# EAGLE board DAq2017 (EAGLE 7.2.0)
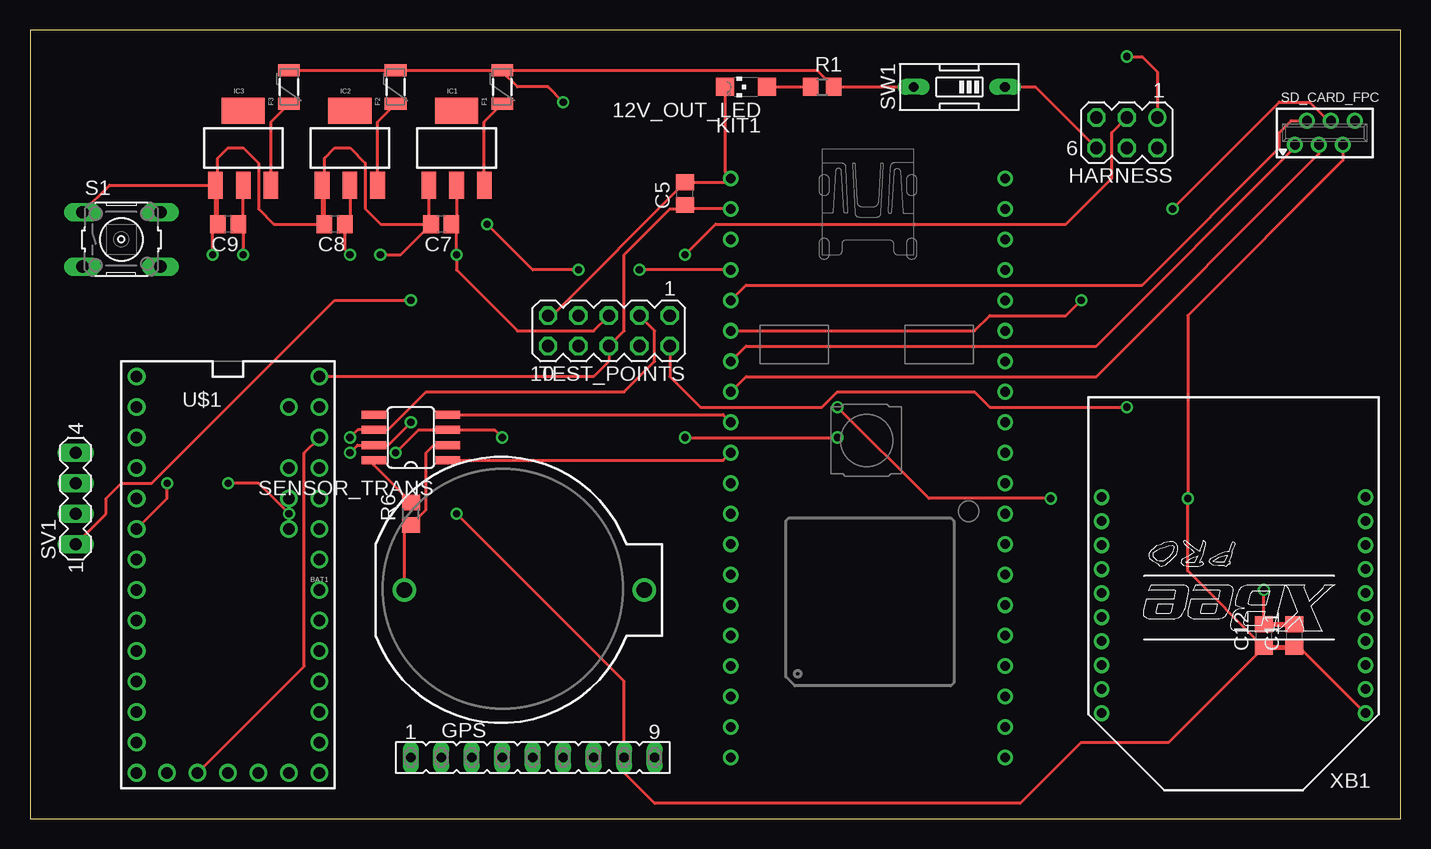
[diagram p0: board, top side]
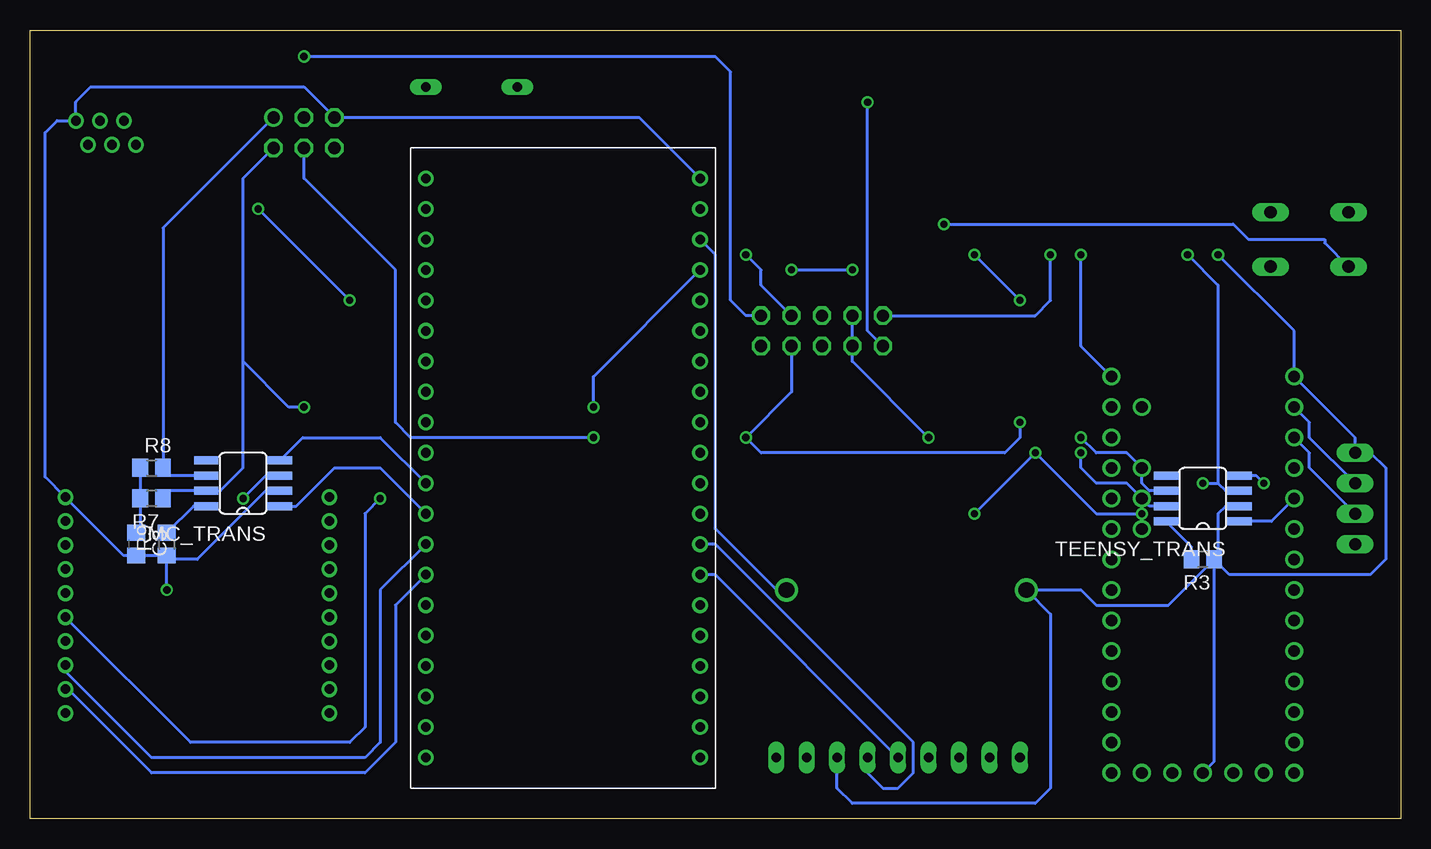
[diagram p1: board, bottom side, seen from below]

Size 114.28 x 65.71 mm. Coordinates in mm from the lower left corner, seen from the top.
Outline: 0,0 114.28,0 114.28,65.71 0,65.71 0,0
Copper layers (1*16): Top 0.035mm / dielectric 1.5mm / Bottom 0.035mm
Design rules "default *": minimum track width 10mil, minimum drill 24mil, track to track 8mil, track to pad 8mil, pad to pad 8mil, via to via 8mil, smd to smd 8mil, copper to edge 40mil, drill to drill 0.0006mm, minimum pad ring 10mil, minimum via ring 8mil, stop-mask expansion 4mil, vias tented up to drill 0mil, thermal gap 10mil

## Footprints (pad centres in the part's own frame; a part is rotated, then mirrored left to right if it is on the bottom)
CHIPLED_1206 = smd 1.5 x 1.5: A 0,-1.75; C 0,1.75
BATTCOM_20MM_PTH = drill 1.3: 1 11.85,0; 2 -8.15,0
C0805 = smd 1.3 x 1.5: 1 -0.95,0; 2 0.95,0
C0805' = smd 1.3 x 1.5: 1 -0.85,0; 2 0.85,0
PTC-1206 = smd 1 x 1.8: 1 -1.4,0; 2 1.4,0
FE09 = drill 0.813 long: 1 -10.16,0; 2 -7.62,0; 3 -5.08,0; 4 -2.54,0; 5 0,0; 6 2.54,0; 7 5.08,0; 8 7.62,0; 9 10.16,0
MA03-2 = drill 1.016: 1 -2.54,-1.27 | drill 1.016 octagon: 2 -2.54,1.27; 3 0,-1.27; 4 0,1.27; 5 2.54,-1.27; 6 2.54,1.27
SOT223 = smd 1.219 x 2.235: 1 -2.311,-3.099; 2 0,-3.099; 3 2.311,-3.099 | smd 3.6 x 2.2: 4 0,3.099
MBED-KIT = drill 0.8: D+ 11.43,1.27; D- 11.43,3.81; GND -11.43,24.13; IF+ 11.43,16.51; IF- 11.43,19.05; NR -11.43,16.51; P$5 -11.43,13.97; P$6 -11.43,11.43; P$7 -11.43,8.89; P$8 -11.43,6.35; P$9 -11.43,3.81; P$10 -11.43,1.27; P$11 -11.43,-1.27; P$12 -11.43,-3.81; P$13 -11.43,-6.35; P$14 -11.43,-8.89; P$15 -11.43,-11.43; P$16 -11.43,-13.97; P$17 -11.43,-16.51; P$18 -11.43,-19.05; P$19 -11.43,-21.59; P$20 -11.43,-24.13; P$21 11.43,-24.13; P$22 11.43,-21.59; P$23 11.43,-19.05; P$24 11.43,-16.51; P$25 11.43,-13.97; P$26 11.43,-11.43; P$27 11.43,-8.89; P$28 11.43,-6.35; P$29 11.43,-3.81; P$30 11.43,-1.27; RD+ 11.43,11.43; RD- 11.43,13.97; TD+ 11.43,6.35; TD- 11.43,8.89; VB -11.43,19.05; VIN -11.43,21.59; VOUT 11.43,24.13; VU 11.43,21.59
SO8 = smd 0.66 x 2.032: 1 -1.905,-3.073; 2 -0.635,-3.073; 3 0.635,-3.073; 4 1.905,-3.073; 5 1.905,3.073; 6 0.635,3.073; 7 -0.635,3.073; 8 -1.905,3.073
R0805 = smd 1.3 x 1.5: 1 -0.95,0; 2 0.95,0
B3F-10XX = drill 1.016 long: 1 -3.251,2.261; 2 3.251,2.261; 3 -3.251,-2.261; 4 3.251,-2.261
FH21-6S-1DSA = drill 0.813: 1 -2.5,-1; 2 -1.5,1; 3 -0.5,-1; 4 0.5,1; 5 1.5,-1; 6 2.5,1
MA04-1 = drill 1.016 long: 1 -3.81,0; 2 -1.27,0; 3 1.27,0; 4 3.81,0
EDG-01 = drill 0.813 long: 1 0,-3.81; 2 0,3.81
MA05-2 = drill 1.016 octagon: 1 -5.08,-1.27; 2 -5.08,1.27; 3 -2.54,-1.27; 4 -2.54,1.27; 5 0,-1.27; 6 0,1.27; 7 2.54,-1.27; 8 2.54,1.27; 9 5.08,-1.27; 10 5.08,1.27
TEENSY3-ALL_PINS = drill 0.965: 0 -7.62,13.97; 1 -7.62,11.43; 2 -7.62,8.89; 3 -7.62,6.35; 3.3V 7.62,11.43; 3.3V1 -2.54,-16.51; 4 -7.62,3.81; 5 -7.62,1.27; 6 -7.62,-1.27; 7 -7.62,-3.81; 8 -7.62,-6.35; 9 -7.62,-8.89; 10 -7.62,-11.43; 11 -7.62,-13.97; 12 -7.62,-16.51; 13 7.62,-16.51; 14/A0 7.62,-13.97; 15/A1 7.62,-11.43; 16/A2 7.62,-8.89; 17/A3 7.62,-6.35; 18/A4 7.62,-3.81; 19/A5 7.62,-1.27; 20/A6 7.62,1.27; 21/A7 7.62,3.81; 22/A8 7.62,6.35; 23/A9 7.62,8.89; A10 5.08,6.35; A11 5.08,3.81; AGND 7.62,13.97; AREF 5.08,8.89; GND -7.62,16.51; GND1 0,-16.51; PGM 2.54,-16.51; RESET/DAC 5.08,-16.51; VBAT -5.08,-16.51; VIN 7.62,16.51; VUSB 5.08,13.97
XBEE-PRO = drill 0.8 pad 1.27: 1 -11,9; 2 -11,7; 3 -11,5; 4 -11,3; 5 -11,1; 6 -11,-1; 7 -11,-3; 8 -11,-5; 9 -11,-7; 10 -11,-9; 11 11,-9; 12 11,-7; 13 11,-5; 14 11,-3; 15 11,-1; 16 11,1; 17 11,3; 18 11,5; 19 11,7; 20 11,9

## Placement (x,y rotation side)
12V_OUT_LED  [CHIPLED_1206]  59.69,60.96 90 top
BAT1  [BATTCOM_20MM_PTH]  39.37,19.05 0 top
C3  [C0805]  105.41,22.86 270 bottom
C5  [C0805]  54.61,52.07 90 top
C7  [C0805']  34.29,49.53 180 top
C8  [C0805']  25.4,49.53 180 top
C9  [C0805']  16.51,49.53 180 top
C11  [C0805]  105.41,15.24 90 top
C12  [C0805]  102.87,15.24 90 top
F1  PTCSMD  [PTC-1206]  39.37,60.96 90 top
F2  PTCSMD  [PTC-1206]  30.48,60.96 90 top
F3  PTCSMD  [PTC-1206]  21.59,60.96 90 top
GPS  [FE09]  41.91,5.08 0 top
HARNESS  [MA03-2]  91.44,57.15 180 top
IC1  [SOT223]  35.56,55.88 0 top
IC2  [SOT223]  26.67,55.88 0 top
IC3  [SOT223]  17.78,55.88 0 top
KIT1  MBED_NXP_LPC1768  [MBED-KIT]  69.85,29.21 0 top
MC_TRANS  SN65HVD230/1  [SO8]  96.52,27.94 90 bottom
R1  1k  [R0805]  66.04,60.96 0 top
R3  4.7K  [R0805]  16.51,21.59 180 bottom
R6  4.7K  [R0805]  31.75,25.4 90 top
R7  60E  [R0805]  104.14,26.67 180 bottom
R8  60E  [R0805]  104.14,29.21 0 bottom
R9  4.7K  [R0805]  102.87,22.86 90 bottom
S1  [B3F-10XX]  7.62,48.26 0 top
SD_CARD_FPC  FH21-6S-1DSA  [FH21-6S-1DSA]  107.95,57.15 0 top
SENSOR_TRANS  SN65HVD230/1  [SO8]  31.75,31.75 90 top
SV1  [MA04-1]  3.81,26.67 90 top
SW1  [EDG-01]  77.47,60.96 90 top
TEENSY_TRANS  SN65HVD230/1  [SO8]  16.51,26.67 90 bottom
TEST_POINTS  [MA05-2]  48.26,40.64 180 top
U$1  TEENSY_3.1_ALL_PINS  [TEENSY3-ALL_PINS]  16.51,20.32 0 top
XB1  XBEE-PRO  [XBEE-PRO]  100.33,17.78 180 top

## Library data of the parts
12V_OUT_LED = led
BAT1 = SparkFun-Electromechanical
C3 C5 C11 C12 R1 = resistor
C7-C9 F1-F3 KIT1 = Ediff+DAQ_v2
GPS = con-lsta; OC_FARNELL: unknown; OC_NEWARK: unknown
HARNESS SV1 TEST_POINTS = con-lstb; OC_FARNELL: unknown; OC_NEWARK: unknown
IC1-IC3 U$1 = dash
MC_TRANS SENSOR_TRANS TEENSY_TRANS = texas_1
R3 R6-R9 = rcl
S1 = switch-omron; MPN: B3F-1000; OC_FARNELL: 176432; OC_NEWARK: 36M3542
SD_CARD_FPC = con-hirose; OC_FARNELL: unknown; OC_NEWARK: unknown
SW1 = special
XB1 = Ediff+DAQ_v2; MPN: XBP24-AWI-001; OC_FARNELL: 1337916; OC_NEWARK: 42M2667

## Nets
3.3V: U$1.3.3V U$1.3.3V1
3V3: C9.1 C11.1 C12.1 GPS.8 IC3.2 MC_TRANS.3 SD_CARD_FPC.5 SENSOR_TRANS.3 TEENSY_TRANS.3 TEST_POINTS.7 TEST_POINTS.8 XB1.1
3V3_OUT_GPS: GPS.1
5V_LCD: C7.1 IC1.2 SV1.1 TEST_POINTS.5
5V_MBED: C5.1 C8.1 IC2.2 KIT1.VIN TEST_POINTS.6 U$1.VIN
12V: HARNESS.6 SW1.1
12V_OUT: F1.2 F2.2 F3.2 R1.2 SW1.2 TEST_POINTS.10
AGND: U$1.AGND
AREF: U$1.AREF
GND: 12V_OUT_LED.C BAT1.2 C3.2 C5.2 C7.2 C8.2 C9.2 C11.2 C12.2 GPS.7 HARNESS.5 IC1.1 IC2.1 IC3.1 KIT1.GND MC_TRANS.2 R3.1 R6.1 R9.1 S1.1 SD_CARD_FPC.6 SENSOR_TRANS.2 SV1.4 TEENSY_TRANS.2 TEST_POINTS.9 U$1.GND U$1.GND1 XB1.10
GPS_EN: GPS.2
GPS_FIX: GPS.4
GPS_PPS: GPS.9
GPS_RX: GPS.6 KIT1.P$13
GPS_TX: GPS.5 KIT1.P$14
GPS_VBAT: GPS.3
LCD_RX: SV1.3 U$1.0
LCD_TX: SV1.2 U$1.1
MC_CAN_H: HARNESS.2 MC_TRANS.7 R7.1 TEST_POINTS.2
MC_CAN_L: HARNESS.1 MC_TRANS.6 R8.2 TEST_POINTS.1
MC_RX: KIT1.P$30 MC_TRANS.4
MC_TX: KIT1.P$29 MC_TRANS.1
N$4: R3.2 TEENSY_TRANS.8
N$5: 12V_OUT_LED.A R1.1
N$8: R6.2 SENSOR_TRANS.8
N$11: C3.1 R7.2 R8.1
N$12: MC_TRANS.8 R9.2
N$14: F1.1 IC1.3
N$19: F2.1 IC2.3
N$24: F3.1 IC3.3
RESET: KIT1.NR S1.3 XB1.5
RTC: BAT1.1 KIT1.VB
SD_MISO: KIT1.P$6 SD_CARD_FPC.4
SD_MOSI: KIT1.P$5 SD_CARD_FPC.2
SD_SCLK: KIT1.P$7 SD_CARD_FPC.1
SD_SS: KIT1.P$8 SD_CARD_FPC.3
SENSOR_CAN_H: HARNESS.4 SENSOR_TRANS.7 TEENSY_TRANS.7 TEST_POINTS.4
SENSOR_CAN_L: HARNESS.3 SENSOR_TRANS.6 TEENSY_TRANS.6 TEST_POINTS.3
SENSOR_RX: KIT1.P$9 SENSOR_TRANS.4
SENSOR_TX: KIT1.P$10 SENSOR_TRANS.1
SLEEP_OUT: XB1.13
TEENSY_RX: TEENSY_TRANS.4 U$1.4
TEENSY_TX: TEENSY_TRANS.1 U$1.3
VBAT: U$1.VBAT
VO: KIT1.VOUT
VU: KIT1.VU
VUSB: U$1.VUSB
XBEE_RX: KIT1.P$28 XB1.3
XBEE_TX: KIT1.P$27 XB1.2

## Tracks (layer width: path | path; a pad name or v marks a point on that pad's centre or on a via)
3.3V
  Top 0.254: U$1.3.3V1 22.86,12.7 22.86,30.48 U$1.3.3V
3V3  (via drill 0.6)
  Top 0.254: C11.1 105.82,14.29 XB1.1 | SD_CARD_FPC.5 109.45,54.84 96.52,41.91 v96.52,26.67 96.52,20.64 C12.1 94.93,6.35 87.63,6.35 82.55,1.27 52.07,1.27 49.53,3.81 GPS.8 49.53,11.43 v35.56,25.4 | IC3.2 17.78,49.95 C9.1 17.78,49.11 v17.78,46.99 | v30.48,30.48 32.38,32.38 SENSOR_TRANS.3 38.73,32.38 v39.37,31.75 | v21.59,25.4 19.05,27.94 v16.51,27.94
  Top 0.406: C12.1 C11.1
  Bottom 0.254: v96.52,26.67 94.61,28.57 MC_TRANS.3 | v17.78,46.99 15.24,44.45 15.24,27.94 | 15.24,27.94 14.61,27.3 TEENSY_TRANS.3 | v21.59,25.4 25.4,25.4 v30.48,30.48 v35.56,25.4 | v16.51,27.94 15.24,27.94 | v39.37,31.75 45.72,38.1 TEST_POINTS.8 TEST_POINTS.7
5V_LCD  (via drill 0.6)
  Top 0.254: IC1.2 35.56,49.95 C7.1 35.56,49.11 v35.56,46.99 35.56,45.72 40.64,40.64 46.99,40.64 TEST_POINTS.5 | SV1.1 6.35,25.4 6.35,26.67 7.62,27.94 10.16,27.94 25.4,43.18 v31.75,43.18
  Bottom 0.254: v31.75,43.18 v35.56,46.99
5V_MBED  (via drill 0.6)
  Top 0.254: KIT1.VIN 54.93,50.8 C5.1 54.61,50.8 53.34,50.8 49.53,46.99 49.53,40.64 TEST_POINTS.6 48.26,38.1 46.99,36.83 U$1.VIN | IC2.2 26.67,49.95 C8.1 26.25,47.41 v26.67,46.99
  Bottom 0.254: U$1.VIN 26.67,39.37 v26.67,46.99
12V
  Top 0.254: SW1.1 83.82,60.96 HARNESS.6
12V_OUT  (via drill 0.6)
  Top 0.254: SW1.2 R1.2 65.59,62.36 F1.2 | F3.2 F2.2 F1.2 | v44.45,59.69 43.18,60.96 40.64,60.96 39.37,62.23 F1.2
  Bottom 0.254: TEST_POINTS.10 44.45,40.64 v44.45,59.69
GND  (via drill 0.6)
  Top 0.254: C12.2 v102.87,19.05 | 12V_OUT_LED.C 57.94,53.82 KIT1.GND 58.1,53.02 C5.2 43.5,41.91 TEST_POINTS.9 | S1.1 6.63,52.78 IC3.1 15.47,49.72 C9.2 | IC2.1 24.36,49.72 C8.2 | IC1.1 33.25,49.72 C7.2 | BAT1.2 31.22,23.92 R6.1 33.02,25.72 33.02,30.48 33.66,31.11 SENSOR_TRANS.2 | C9.2 15.66,55.03 16.51,55.88 17.78,55.88 19.05,54.61 19.05,50.8 20.32,49.53 C8.2 | C8.2 24.55,55.03 25.4,55.88 26.67,55.88 27.94,54.61 27.94,50.8 29.21,49.53 C7.2 | v15.24,46.99 15.24,49.53 C9.2 | v29.21,46.99 30.9,46.99 C7.2
  Top 0.406: C12.2 C11.2
  Bottom 0.254: R9.1 C3.2 106.46,21.91 XB1.10 113.03,28.48 113.03,57.15 112.03,58.15 SD_CARD_FPC.6 110.45,59.73 109.22,60.96 91.44,60.96 HARNESS.5 63.5,58.42 KIT1.GND | MC_TRANS.2 94.61,27.3 100.33,21.59 102.55,21.59 R9.1 | v102.87,19.05 R9.1 | TEENSY_TRANS.2 14.61,26.04 15.24,25.4 15.24,21.91 R3.1 | U$1.GND1 15.56,4.76 R3.1 | R3.1 19.37,17.78 25.4,17.78 26.67,19.05 BAT1.2 29.21,17.04 29.21,2.54 30.48,1.27 45.72,1.27 46.99,2.54 GPS.7 | v15.24,46.99 8.89,40.64 U$1.GND 3.81,31.75 SV1.4 2.54,30.48 1.27,29.21 1.27,21.59 2.54,20.32 14.29,20.32 R3.1 | TEST_POINTS.9 30.48,41.91 29.21,43.18 v29.21,46.99
GPS_RX
  Bottom 0.254: GPS.6 44.45,3.81 43.18,2.54 41.91,2.54 40.64,3.81 40.64,6.35 57.15,22.86 KIT1.P$13
GPS_TX
  Bottom 0.254: GPS.5 57.15,20.32 KIT1.P$14
LCD_RX
  Bottom 0.254: SV1.3 7.62,31.75 7.62,33.02 U$1.0
LCD_TX
  Bottom 0.254: SV1.2 7.62,29.21 7.62,30.48 U$1.1
MC_CAN_H  (via drill 0.6)
  Top 0.254: TEST_POINTS.2 53.34,36.83 55.88,34.29 66.04,34.29 67.31,35.56 78.74,35.56 80.01,34.29 v91.44,34.29
  Bottom 0.254: R7.1 102.56,27.3 MC_TRANS.7 98.42,27.3 96.52,29.21 96.52,38.1 | 96.52,38.1 96.52,53.34 HARNESS.2 | v91.44,34.29 92.71,34.29 96.52,38.1
MC_CAN_L  (via drill 0.6)
  Top 0.254: v91.44,63.5 92.71,63.5 93.98,62.23 HARNESS.1
  Bottom 0.254: MC_TRANS.6 102.56,28.57 R8.2 103.19,49.21 HARNESS.1 | TEST_POINTS.1 54.61,41.91 55.88,43.18 55.88,62.23 57.15,63.5 v91.44,63.5
MC_RX
  Bottom 0.254: MC_TRANS.4 91.54,31.75 85.09,31.75 KIT1.P$30
MC_TX
  Bottom 0.254: MC_TRANS.1 92.08,26.04 88.9,29.21 85.09,29.21 KIT1.P$29
N$4
  Bottom 0.254: R3.2 17.46,22.64 TEENSY_TRANS.8
N$5
  Top 0.254: 12V_OUT_LED.A R1.1
N$8
  Top 0.254: R6.2 28.68,29.42 SENSOR_TRANS.8
N$11
  Bottom 0.254: R8.1 R7.2 105.09,24.13 C3.1
N$12
  Bottom 0.254: MC_TRANS.8 100.64,26.04 R9.2
N$14
  Top 0.254: IC1.3 37.87,58.06 F1.1
N$19
  Top 0.254: IC2.3 28.98,58.06 F2.1
N$24
  Top 0.254: IC3.3 20.09,58.06 F3.1
RESET  (via drill 0.6)
  Top 0.254: v85.09,26.67 74.93,26.67 v67.31,34.29 | KIT1.NR v50.8,45.72 | v45.72,45.72 41.91,45.72 v38.1,49.53
  Bottom 0.254: v67.31,34.29 67.31,36.83 KIT1.NR | v50.8,45.72 v45.72,45.72 | v38.1,49.53 13.97,49.53 12.7,48.26 6.35,48.26 6.35,47.98 S1.3 | v85.09,26.67 86.36,25.4 86.36,7.62 87.63,6.35 100.9,6.35 XB1.5
RTC
  Bottom 0.254: BAT1.1 52.07,19.05 57.15,24.13 57.15,46.99 KIT1.VB
SD_MISO  (via drill 0.6)
  Top 0.254: v95.25,50.8 104.14,59.69 106.68,59.69 108.22,58.15 SD_CARD_FPC.4 | KIT1.P$6 78.74,40.64 80.01,41.91 86.36,41.91 v87.63,43.18
  Bottom 0.254: v87.63,43.18 v95.25,50.8
SD_MOSI
  Top 0.254: KIT1.P$5 59.69,44.45 92.71,44.45 104.14,55.88 104.14,57.15 105.14,58.15 SD_CARD_FPC.2
SD_SCLK
  Top 0.254: KIT1.P$7 59.69,39.37 88.9,39.37 105.45,55.92 SD_CARD_FPC.1
SD_SS
  Top 0.254: KIT1.P$8 59.69,36.83 88.9,36.83 107.45,55.38 SD_CARD_FPC.3
SENSOR_CAN_H  (via drill 0.6)
  Top 0.254: v26.67,30.48 27.3,31.11 SENSOR_TRANS.7 29.84,31.11 v31.75,33.02 | v54.61,31.75 v67.31,31.75
  Bottom 0.254: TEENSY_TRANS.7 20.95,26.04 22.86,27.94 25.4,27.94 26.67,29.21 v26.67,30.48 | TEST_POINTS.4 50.8,35.56 v54.61,31.75 53.34,30.48 33.02,30.48 31.75,31.75 v31.75,33.02 | v67.31,31.75 82.55,31.75 83.82,33.02 83.82,45.72 91.44,53.34 HARNESS.4
SENSOR_CAN_L  (via drill 0.6)
  Top 0.254: v54.61,46.99 57.15,49.53 86.36,49.53 90.17,53.34 90.17,57.15 HARNESS.3 | TEST_POINTS.3 52.07,40.64 52.07,38.1 49.53,35.56 33.02,35.56 29.84,32.38 SENSOR_TRANS.6 27.3,32.38 v26.67,31.75
  Bottom 0.254: TEENSY_TRANS.6 20.95,27.3 21.59,27.94 21.59,29.21 22.86,30.48 25.4,30.48 v26.67,31.75 | TEST_POINTS.3 53.34,44.45 53.34,45.72 v54.61,46.99
SENSOR_RX
  Top 0.254: SENSOR_TRANS.4 57.78,33.66 KIT1.P$9
SENSOR_TX
  Top 0.254: SENSOR_TRANS.1 57.78,29.84 KIT1.P$10
TEENSY_RX  (via drill 0.6)
  Top 0.254: U$1.4 11.43,26.67 v11.43,27.94
  Bottom 0.254: v11.43,27.94 12.06,28.57 TEENSY_TRANS.4
TEENSY_TX
  Bottom 0.254: U$1.3 10.79,24.77 TEENSY_TRANS.1
XBEE_RX
  Bottom 0.254: KIT1.P$28 85.09,19.05 85.09,6.35 86.36,5.08 104.14,5.08 111.33,12.27 XB1.3
XBEE_TX
  Bottom 0.254: KIT1.P$27 83.82,17.78 83.82,6.35 86.36,3.81 104.14,3.81 111.11,10.78 XB1.2